# Altium PCB PCB_LICH_VAN_NIEN_VER2.PcbDoc
Units mm, origin at the board's own origin, x right, y up, seen from the top; angles counter-clockwise.
Board outline 98.8 x 97.6 mm, 2 copper layers (Top Layer, Bottom Layer); 31 components, 43 nets, 145 pads, 28 vias.
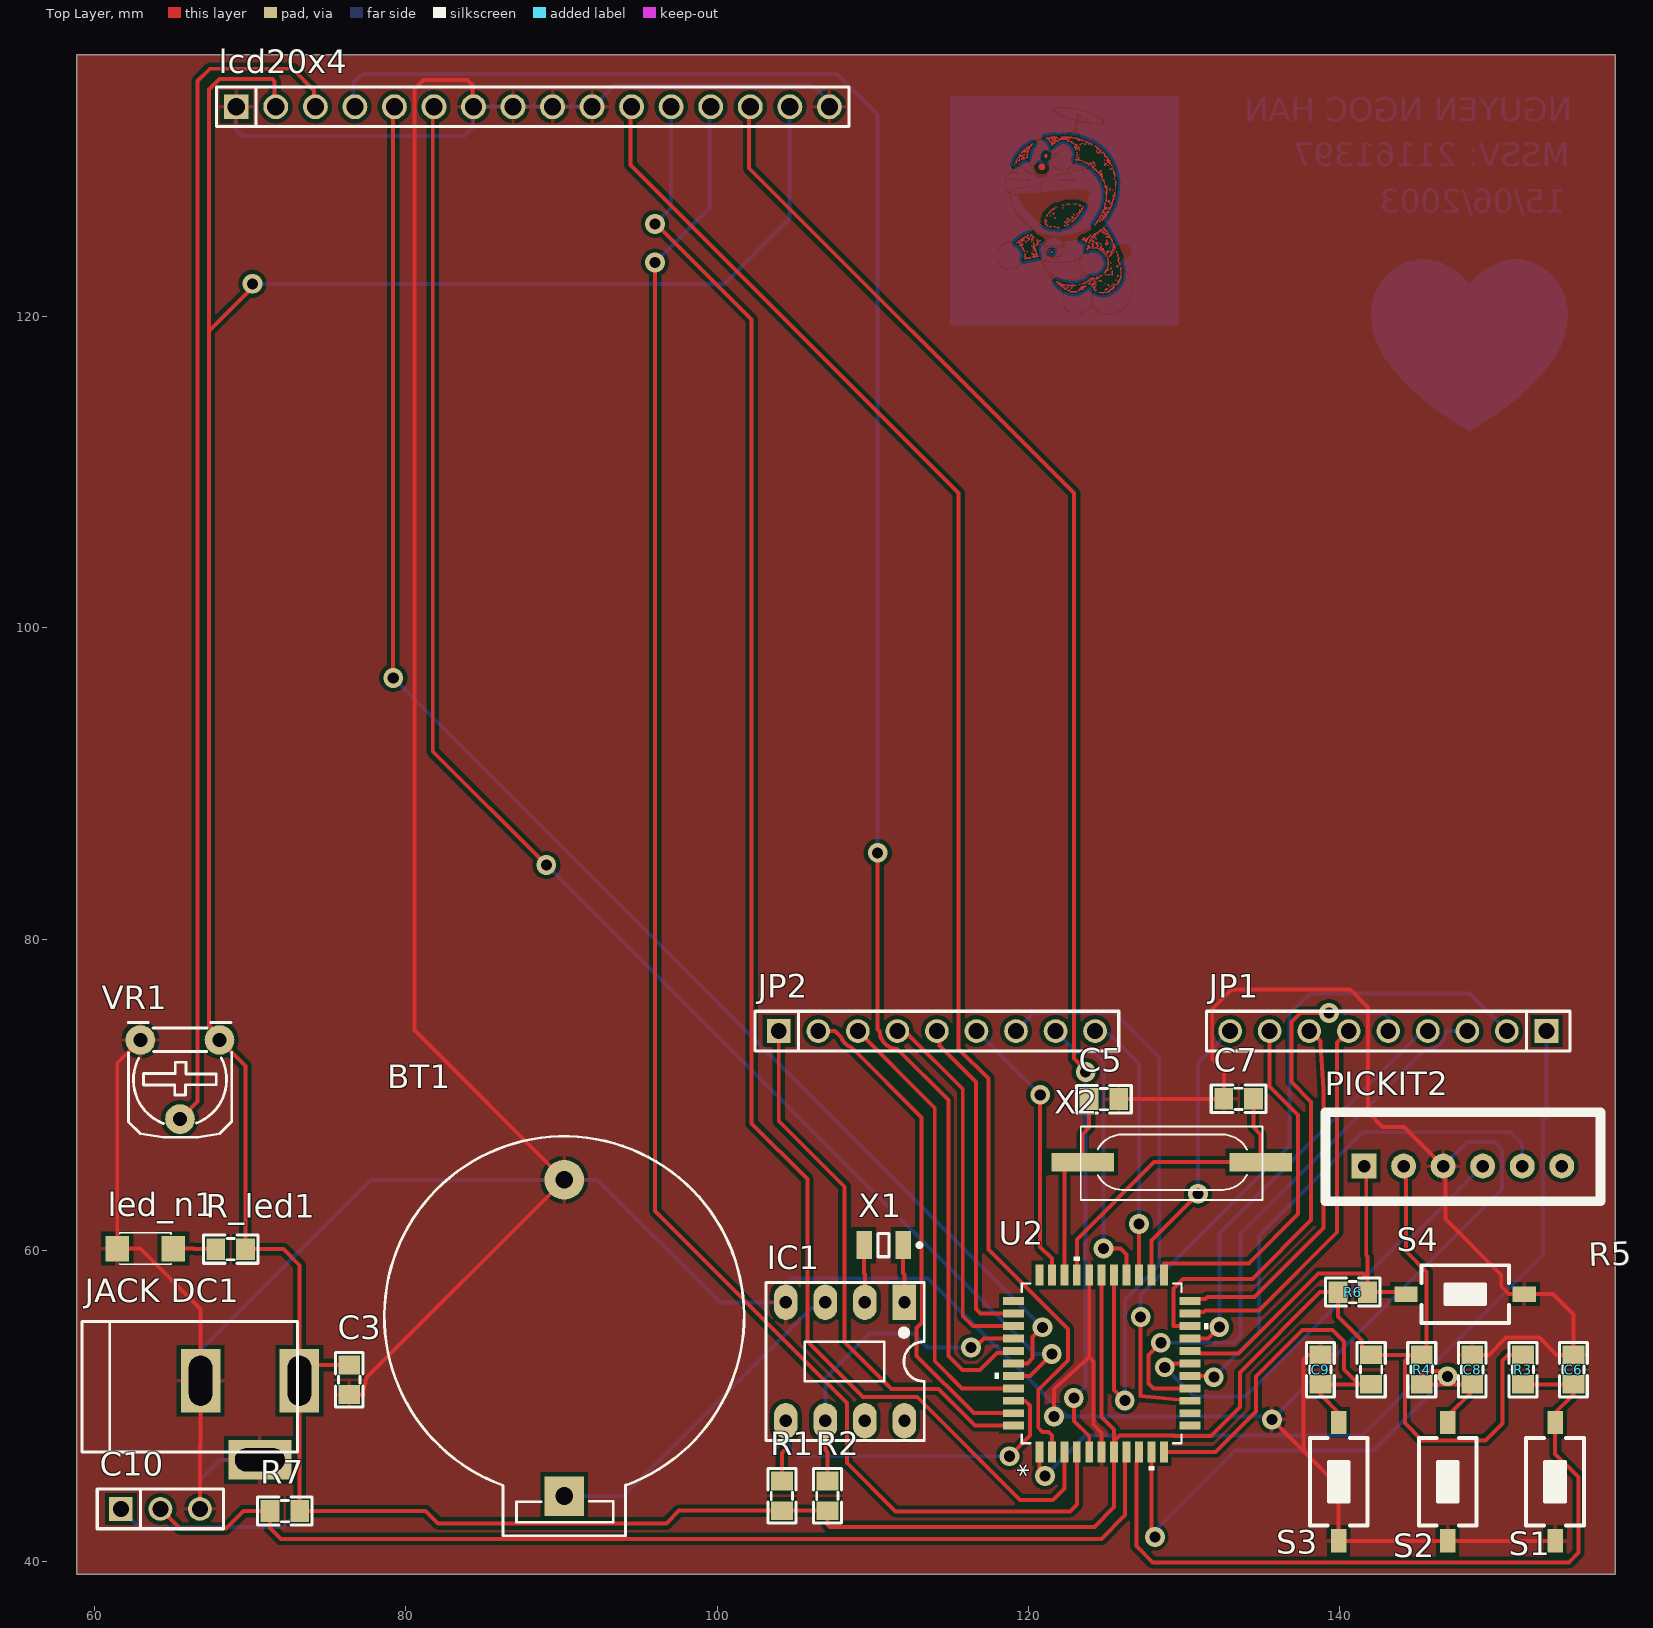
[diagram p0: Top Layer view]
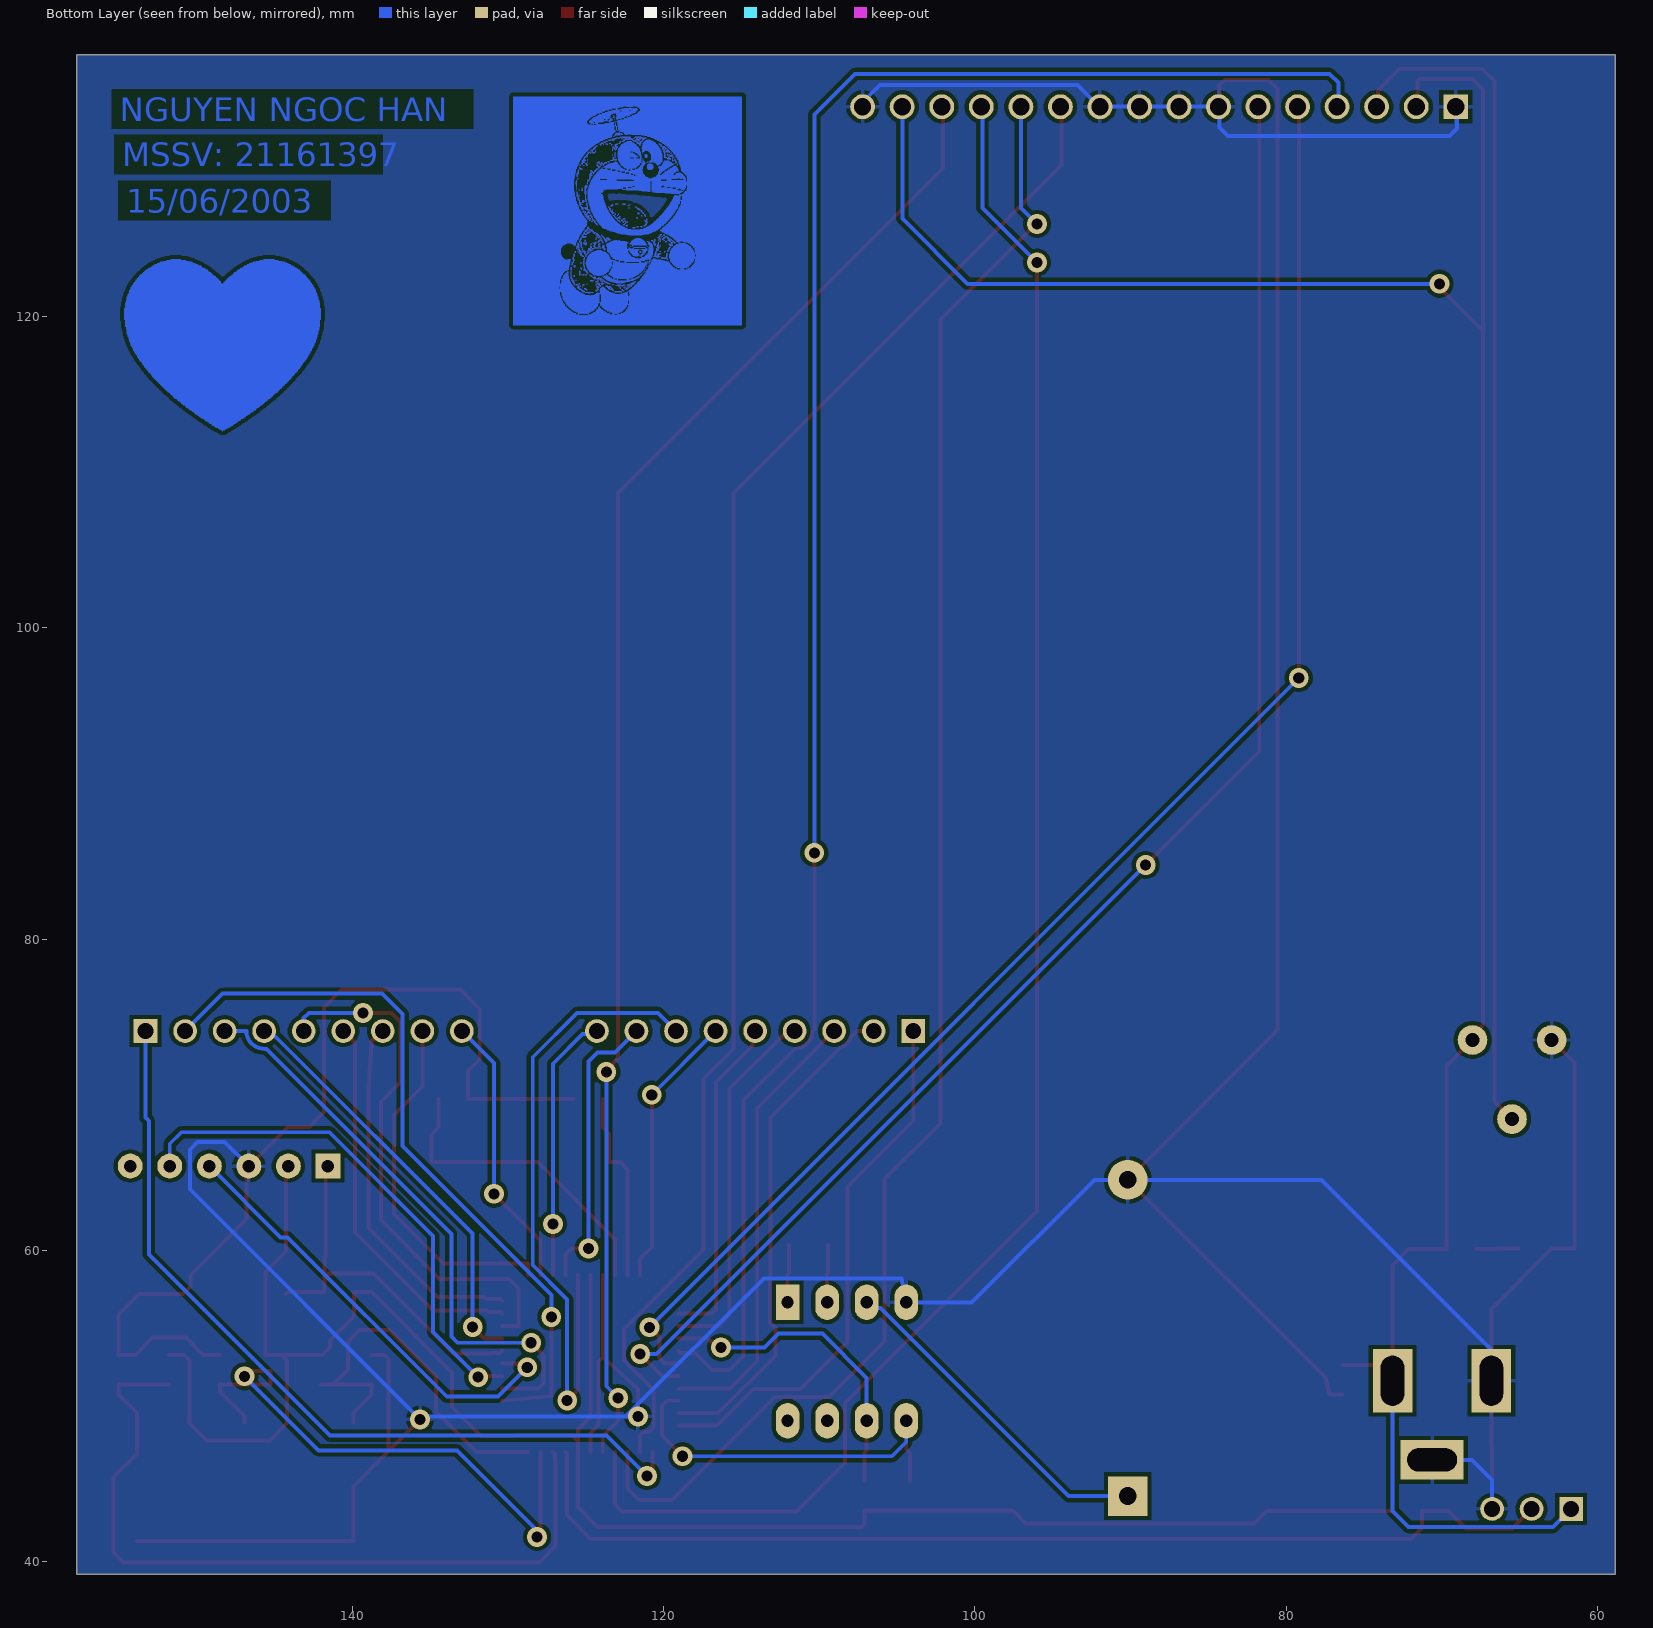
[diagram p1: Bottom Layer view, seen from below]
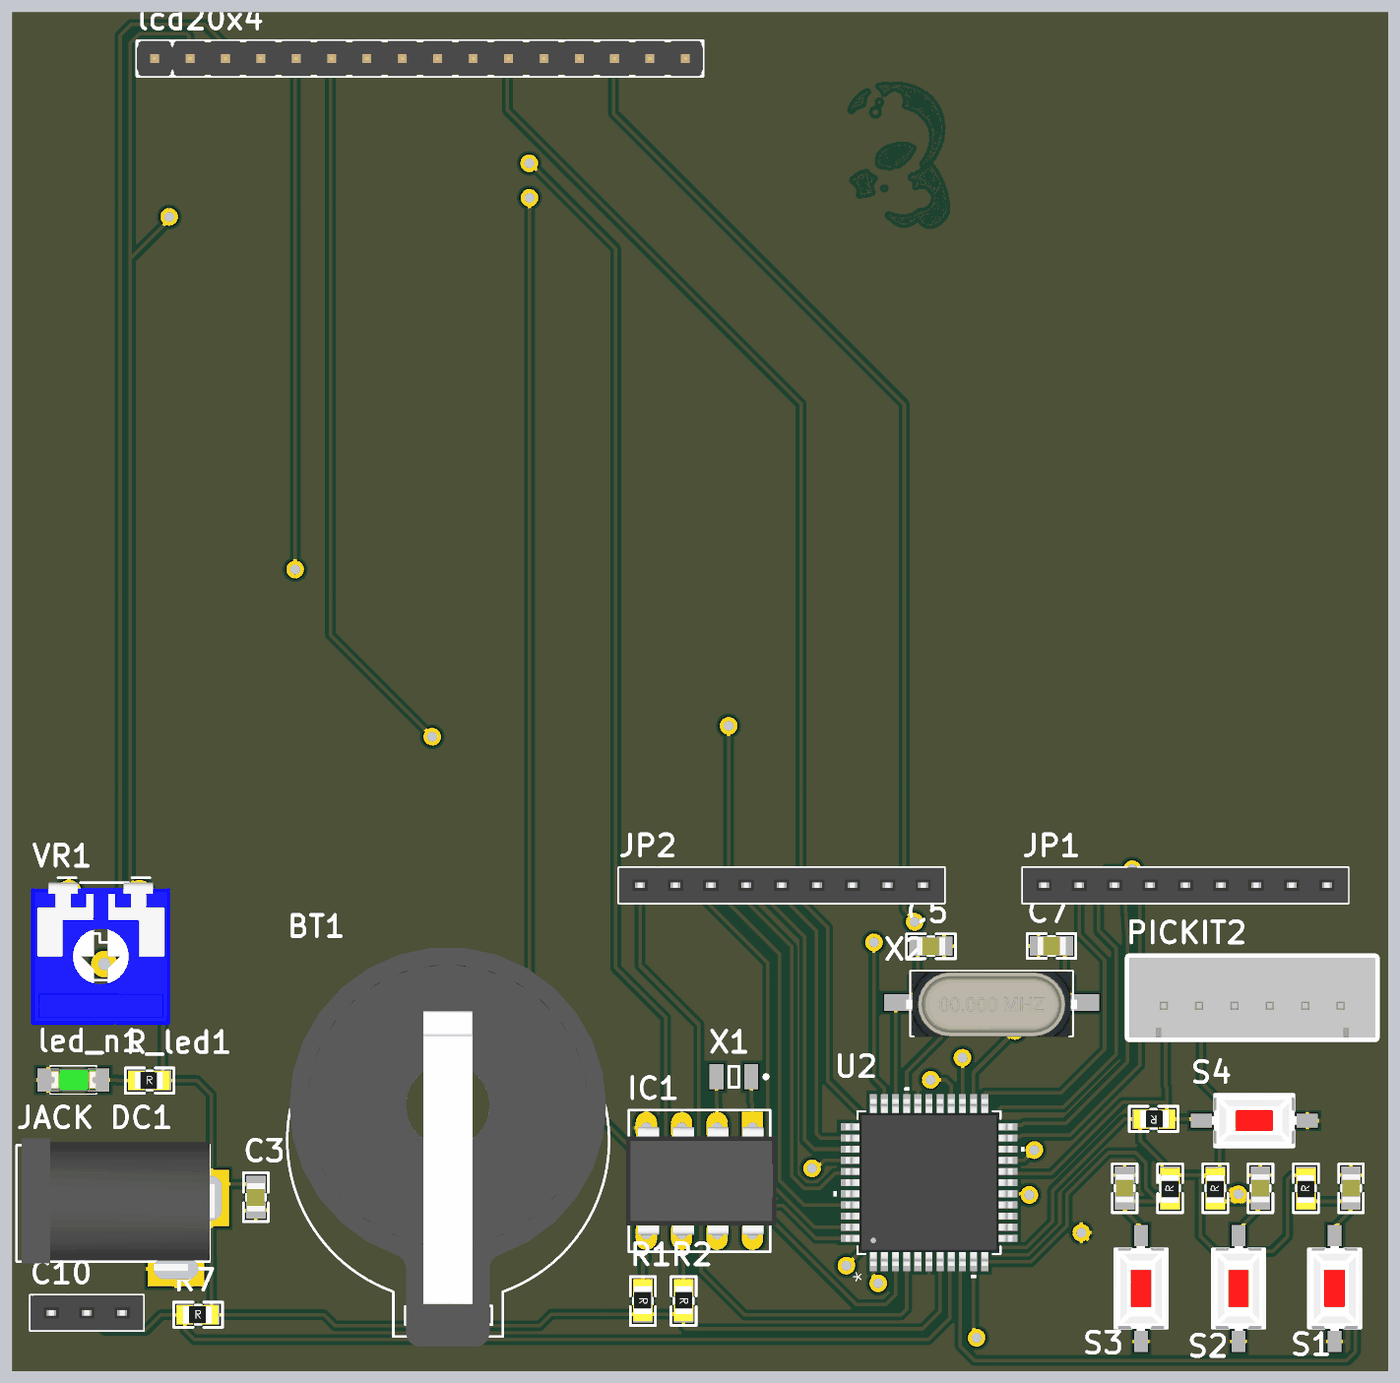
[diagram p2: 3D render of the assembled board from above, using the file's embedded part models]

## Layer stack, top to bottom
Top Solder: solder mask 0.0102, Solder Resist, Dk 3.5
Top Layer: signal copper 0.0356
Dielectric 1: dielectric 0.32, FR-4, Dk 4.8
Bottom Layer: signal copper 0.0356
Bottom Solder: solder mask 0.0102, Solder Resist, Dk 3.5

## Board outline
58.875,39.2 157.675,39.2 157.675,136.8 58.875,136.8

## Design rules (kind name [scope] priority, off if disabled: settings)
Clearance [All] p1: gap=0.254 ignorepadtopadclearanceinfootprint=FALSE except(0: Arc-Hole Track-Hole SMDPad-Hole THPad-Hole Via-Hole Fill-Hole Poly-Hole Region-Hole Text-Hole)
PolygonConnect [All] p1: connectstyle=Relief reliefconductorwidth=0.254 reliefentries=4 polygonreliefangle="90 Angle" airgapwidth=0.254
RoutingVias [All] p1: holewidth=0.711 width=1.27 viastyle="Through Hole" minholewidth=0.711 minwidth=1.27 maxholewidth=0.711 maxwidth=1.27
SolderMaskExpansion [All] p1: expansion=0.102 istentingtop=FALSE
Width [All] p1: maxlimit=0.254 minlimit=0.254 preferedwidth=0.254
30 further rules are at their usual default settings.

## Components (designator, comment, footprint, x,y, rotation, side; value= is the part's Value field where it differs from the comment)
BT1 "PIN 3V" PIN3V 90.175,44.225 r90 top
C3 "104" "tu 0805" 76.371,51.702 r270 top
C5 "104" "tu 0805" 124.843,69.723 r180 top
C6 "104" "tu 0805" 155,52.347 r90 top
C7 "104" "tu 0805" 133.493,69.748 r0 top
C8 "104" "tu 0805" 148.499,52.347 r90 top
C9 "104" "tu 0805" 138.747,52.347 r90 top
C10 "DHT11" JP3-C1T 61.695,43.4 r0 top
IC1 "DS1307" DIP8 108.343,52.873 r180 top
"JACK DC1" "JACK DC 5.5" "JACK DC 5.5" 69.993,49.098 r0 top value="Jac DC"
JP1 "JP 1x9 2.54" "JP 1x9 CT" 143.11,74.1 r180 top
JP2 "JP 1x9 2.54" "JP 1x9 CT" 114.115,74.1 r0 top
lcd20x4 "JP16" JP16-D1T 69.105,133.475 r0 top
led_n1 "LED 0805" LED-1206-Green 65.068,60.123 r180 top
PICKIT2 "Header 6P 2.54 Duc Thang" XH2.54M-6 141.555,65.425 r0 top
R1 "4.7k" "tro smd 0805" 104.218,44.248 r270 top
R2 "4.7k" "tro smd 0805" 107.143,44.248 r270 top
R3 "4.7k" "tro smd 0805" 151.699,52.35 r90 top
R4 "4.7k" "tro smd 0805" 145.197,52.35 r90 top
R5 "4.7k" "tro smd 0805" 141.946,52.35 r90 top
R6 "4.7k" "tro smd 0805" 140.829,57.264 r180 top
R7 "4.7k" "tro smd 0805" 72.225,43.325 r0 top
R_led1 "1k" "tro smd 0805" 68.743,60.148 r0 top
S1 "SW" "BUTTON-SMD 2PIN" 153.825,45.15 r90 top
S2 "SW" "BUTTON-SMD 2PIN" 146.925,45.15 r90 top
S3 "SW" "BUTTON-SMD 2PIN" 139.925,45.15 r90 top
S4 "SW" "BUTTON-SMD 2PIN" 148.05,57.2 r180 top
U2 "PIC16F887-IPTVAO" TQFP44_PT_MCH 124.7,52.75 r90 top
VR1 "10k" VR-S2 68.03,73.525 r180 top
X1 "32768hz" XT2-32.768KHz-2_V 110.693,60.348 r180 top value=4Mhz
X2 "20Mhz" XTAL-RU49/4 134.15,65.675 r180 top value=4Mhz

## Footprints (in the part's own frame and the unit in brackets; to place one, negate y for a bottom-side part, rotate by r counter-clockwise, add the part's x,y. Pads: shape width x height; smd on the part's side, far side on the other; paste and mask are expansions set on the pad)
"BUTTON-SMD 2PIN" [mm] "Switch SMD type"
  rect 1.5x1 smd: 1(-3.8,0) 2(3.8,0)
  silkscreen extent -2.82,-1.85 2.82,1.85, body extent -3.05,-1.85 3.05,1.85, height 2.5
DIP8 [mil] "DIP, 8-Leads, Row Spacing 7.62mm, Pitch 2.54mm, Body 9.91x6.73mm"
  rect 60x90 hole 31: 1(-145,-150)
  oval 60x90 hole 31: 2(-45,-150) 3(55,-150) 4(155,-150) 5(155,150) 6(55,150) 7(-45,150) 8(-145,150)
  silkscreen extent -195,-200 205,200, body extent -213,-153 213,153, height 177
"JACK DC 5.5" [mm] "Jac DC input"
  rect 2.54x4.064 hole 1.5 slot 3.2 at 90 deg: 1(3.175,2.54) 2(-3.175,2.54)
  rect 4.064x2.54 hole 1.5 slot 3.2 at 0 deg: 3(0.635,-2.54)
  silkscreen extent -10.8,-2.03 3.05,6.35, body extent -10.42,-2.67 3.4,6.84, height 11.02
JP3-C1T [mm] "3 row, straight, gold plating"
  rect 1.52x1.52 hole 1.02: 1(0,0)
  round 1.52 hole 1.02: 2(2.54,0) 3(5.08,0)
  silkscreen extent -1.52,-1.27 6.6,1.27, body extent -1.52,-1.25 6.6,1.25, height 8.51
JP16-D1T [mm] "16  pins, 1 row, straight, gold plating"
  rect 1.6x1.6 hole 1.1: 1(0,0)
  round 1.6 hole 1.1: 2(2.54,0) 3(5.08,0) 4(7.62,0) 5(10.16,0) 6(12.7,0) 7(15.24,0) 8(17.78,0) 9(20.32,0) 10(22.86,0) 11(25.4,0) 12(27.94,0) 13(30.48,0) 14(33.02,0) 15(35.56,0) 16(38.1,0)
  silkscreen extent -1.27,-1.27 39.37,1.27, body extent -1.27,-1.27 39.37,1.27, height 8.54
"JP 1x9 CT" [mm] "9 row, straight, gold plating"
  rect 1.52x1.52 hole 1.02: 1(-10.16,0)
  round 1.52 hole 1.02: 2(-7.62,0) 3(-5.08,0) 4(-2.54,0) 5(0,0) 6(2.54,0) 7(5.08,0) 8(7.62,0) 9(10.16,0)
  silkscreen extent -11.68,-1.27 11.68,1.27, body extent -11.68,-1.25 11.68,1.25, height 8.51
LED-1206-Green [mil]
  rect 60x65 smd: 1(0,0) 2(142,0)
  silkscreen extent 6,-40 136,40, body extent 7,-31 133,32, height 43
PIN3V [mil] "Socket PIN 3V"
  rect 100x100 hole 45: 1(0,0)
  round 100 hole 45: 2(800,0)
  silkscreen extent -100,-455 910,455, body extent -128,-447 1002,449, height 278
TQFP44_PT_MCH [mil]
  rect 53x20 smd paste+0 mask+0: 1(-223.5,157.48) 2(-223.5,125.98) 3(-223.5,94.49) 4(-223.5,62.99) 5(-223.5,31.5) 6(-223.5,0) 7(-223.5,-31.5) 8(-223.5,-62.99) 9(-223.5,-94.49) 10(-223.5,-125.99) 11(-223.5,-157.48) 23(223.5,-157.48) 24(223.5,-125.99) 25(223.5,-94.49) 26(223.5,-62.99) 27(223.5,-31.5) 28(223.5,0) 29(223.5,31.5) 30(223.5,62.99) 31(223.5,94.49) 32(223.5,125.98) 33(223.5,157.48)
  rect 20x53 smd paste+0 mask+0: 12(-157.48,-223.5) 13(-125.98,-223.5) 14(-94.49,-223.5) 15(-62.99,-223.5) 16(-31.5,-223.5) 17(0,-223.5) 18(31.5,-223.5) 19(62.99,-223.5) 20(94.49,-223.5) 21(125.98,-223.5) 22(157.48,-223.5) 34(157.48,223.5) 35(125.98,223.5) 36(94.49,223.5) 37(62.99,223.5) 38(31.5,223.5) 39(0,223.5) 40(-31.5,223.5) 41(-62.99,223.5) 42(-94.49,223.5) 43(-125.98,223.5) 44(-157.48,223.5)
  silkscreen extent -270,-270 270,270, body extent -236,-236 236,236, height 47
"tro smd 0805" [mm]
  rect 1.2x1.4 smd: 1(-0.946,-0.061) 2(0.954,-0.061)
  silkscreen extent -1.75,-0.97 1.75,0.84, body extent -1.56,-0.76 1.44,0.64, height 0.53
"tu 0805" [mm] "Compoment SMD 80x50mil"
  rect 1.2x1.4 smd: 1(-0.946,-0.003) 2(0.954,-0.003)
  silkscreen extent -1.75,-0.89 1.75,0.89, body extent -1.01,-0.64 1.01,0.63, height 0.61
VR-S2 [mil] "Resistor Variable"
  round 75 hole 35: 1(0,0) 2(100,200) 3(200,0)
  silkscreen extent -31,-44 231,246, body extent -87,-30 307,372, height 165
XH2.54M-6 [mm]
  rect 1.6x1.6 hole 0.8: 1(0,0)
  round 1.6 hole 0.8: 2(2.54,0) 3(5.08,0) 4(7.62,0) 5(10.16,0) 6(12.7,0)
  silkscreen extent -2.48,-2.26 15.18,3.46, body extent -2.48,-2.26 15.18,3.48, height 6.91
XT2-32.768KHz-2_V [mm] "Hand Drawn, 2-Leads, Body 3.2x1.5mm, Pitch 2.5mm"
  rect 1x1.8 smd: 1(-1.25,0) 2(1.25,0)
  silkscreen extent -2.43,-0.75 0.35,0.75, body extent -1.6,-0.75 1.6,0.75, height 0.9
XTAL-RU49/4 [mm]
  rect 4x1.2 smd: 1(-0.762,0) 2(10.668,0)
  silkscreen extent -0.89,-2.29 10.8,2.41, body extent -1.2,-2.22 11.1,2.48, height 4.3

## Part data
BT1: "Battery 3VDC"
C3 C5 C6 C7 C8 C9: library part "Tu 0805 104 50V 10%", "Dán", Chung_Loai=Dán, Don_Vi=Con, Ma_Hang=MH004551, So_Chan=2, Ten_Linh_Kien="Tụ 0805 104-100nF 10% 50V"
C10: library part JP3, "WR-PHD 2.54 mm Angled Socket Header", Manufacturer="W¨¹rth Elektronik eiSos GmbH", partNo=613003143121, ComponentLink1 Description=Manufacturer, ComponentLink1URL=http://www.we-online.com, ComponentLink2 Description=Datasheet, ComponentLink2URL=http://katalog.we-online.de/em/datasheet/6130xx143121.pdf, Created by="Karrer Zheng", Created Date="29 March 2013", NoPins=03
IC1: "Real Timer Serial"
JP1 JP2: library part "JP 1x9 2.54 Cai Thang", "Cắm", Chung_Loai=Cắm, Don_Vi=Con, Ma_Hang=MH004006, Ten_Linh_Kien="Jump Đơn Cái 2.54MM 1x20P Thẳng"
lcd20x4: "WR-PHD 2.54 mm Angled Socket Header", Manufacturer="W¨¹rth Elektronik eiSos GmbH", partNo=613016143121, ComponentLink1 Description=Manufacturer, ComponentLink1URL=http://www.we-online.com, ComponentLink2 Description=Datasheet, ComponentLink2URL=http://katalog.we-online.de/em/datasheet/6130xx143121.pdf, Created by="Karrer Zheng", Created Date="29 March 2013", NoPins=16
led_n1: library part "LED 1206 Xanh La", "Dán", Chung_Loai=Dán, Don_Vi=Con, Ma_Hang=MH002947, Ten_Linh_Kien="LED1206 Màu Xanh Lá (Green)"
PICKIT2: "Cắm", Chung_Loai=Cắm, Don_Vi=Con, Ma_Hang=MH001972, Ten_Linh_Kien="Header 6P XH2.54-6P Đực Thẳng"
R1 R2 R3 R4 R5 R6 R7 R_led1: library part "Tro 0805 5% 4.7k", "Dán", Chung_Loai=Dán, Don_Vi=Con, Ma_Hang=MH005307, So_Chan=2, Ten_Linh_Kien="Trở 0805 5% 4.7k"
S1 S2 S3 S4: library part SW-Button, "Switch-Button", LatestRevisionDate=17-Jul-2002, LatestRevisionNote="Re-released for DXP Platform.", PackageReference=SPST-2, Published=24-Mar-1999, Publisher="Altium Limited"
U2: "No Description Available", Mfr_Name=Microchip, RefDes=RefDes, Type=Type
VR1: library part "Resistor Var"
X1 X2: library part XT2, "Crystal, 32.768 KHz, -40 to 85 degC, 3.2 x 1.5 x 0.9 mm SMD"

## Via types
v1: diameter 1.27, hole 0.711, Top Layer to Bottom Layer, 28 vias

## Nets (pads, with @x,y where several pads share a name; then routed paths per layer and width w, separated by ;. In a path a pad name is that pad's centre, name@x,y a point inside that pad or via, vN(x,y) a via of type N, cw(c..) or ccw(c..) an arc to the next point about the centre after c; other vN are vias at no path point)
5V: "JACK DC1.1" C3.1 C10.1 lcd20x4.2 lcd20x4.15 PICKIT2.2 R1.2 R2.2 R3.2 R4.2 R5.2 R6.2 R7.2 R_led1.2 U2.7 U2.28 VR1.1 | length 301.2
  Top Layer w0.254: v1(70.149,122.101) 70.149,121.874 67.35,119.075 ; lcd20x4.2@71.57,133.5 71.57,135.101 71.421,135.25 68.025,135.25 67.35,134.575 67.35,119.075 ; C3.1 74.178,52.648 73.168,51.638 ; U2.28 124.7,49.306 125.5,48.506 125.5,47.752 ; PICKIT2.2 144.235,65.285 144.235,59.956 145.567,58.623 145.567,53.304 R4.2 144.526,53.304 ; R3.2 150.8,53.304 150.444,52.949 150.444,48.895 149.352,47.803 145.288,47.803 144.17,48.92 144.17,52.949 144.526,53.304 ; 67.35,119.075 67.35,74.499 68.03,73.819 VR1.1 69.697,71.858 R_led1.2 72.136,60.087 73.168,59.055 73.168,51.638 ; 73.168,51.638 73.168,47.433 73.179,47.422 R7.2 81.272,43.264 82.067,42.469 96.737,42.469 97.561,43.293 R1.2 R2.2 107.082,42.399 107.231,42.25 124.225,42.25 125.5,43.525 U2.7 125.5,47.752 ; 125.5,47.752 125.881,48.133 129.337,48.133 129.385,48.085 131.71,48.085 133.575,49.95 133.575,52.175 138.725,57.325 R6.2 139.875,55.775 141.434,54.216 141.434,53.777 141.907,53.304 R5.2 144.526,53.304
  Bottom Layer w0.254: C10.1 62.855,42.24 72.136,42.24 73.168,43.272 73.168,51.638 ; v1(70.149,122.101) 100.459,122.101 104.65,126.292 104.65,133.44 lcd20x4.15@104.59,133.5
CLK: PICKIT2.5 U2.16 | length 33.3
  Top Layer w0.254: U2.16 131.819,51.95 v1(131.902,51.867)
  Bottom Layer w0.254: v1(131.902,51.867) 134.798,54.762 134.798,60.948 141.45,67.6 150.975,67.6 151.715,66.86 PICKIT2.5
DAT: PICKIT2.4 U2.17 | length 29.1
  Top Layer w0.254: v1(128.753,52.496) 129.007,52.75 U2.17
  Bottom Layer w0.254: v1(128.753,52.496) 130.626,50.622 133.922,50.622 144.144,60.844 144.594,60.844 PICKIT2.4
DATA: C10.2 R7.1 U2.8 | length 69.1
  Top Layer w0.254: C10.2 65.496,42.139 68.453,42.139 69.579,43.264 R7.1 71.279,42.164 71.968,41.475 124.675,41.475 126.2,43 126.2,46.973 U2.8
EN: lcd20x4.6 U2.40 | length 100.3
  Top Layer w0.254: lcd20x4.6@81.73,133.5 81.73,92.066 v1(89.027,84.769) ; U2.40 120.091,51.95 v1(121.497,53.356)
  Bottom Layer w0.254: v1(89.027,84.769) 120.44,53.356 v1(121.497,53.356)
GND: "JACK DC1.2" "JACK DC1.3" BT1.2 C3.2 C5.1 C6.2 C7.1 C8.2 C9.2 C10.3 IC1.4 lcd20x4.1 lcd20x4.7 lcd20x4.8 lcd20x4.9 lcd20x4.10 lcd20x4.16 led_n1.2 PICKIT2.3 S1.1 S2.1 S3.1 S4.1 U2.6 U2.29 VR1.3 | length 403.3
  Top Layer w0.254: VR1.3 61.461,72.036 led_n1.2 62.94,60.123 66.818,56.245 66.818,51.638 66.818,47.515 66.775,47.473 C10.3 ; C3.2 77.216,50.748 77.47,51.84 BT1.2 80.543,74.177 80.543,134.62 81.128,135.204 83.94,135.204 84.27,134.874 lcd20x4.7@84.27,133.5 ; v1(121.641,49.342) 121.641,51.098 123.9,53.149 ; U2.29 123.9,53.149 ; U2.6 124.7,48.29 124.181,48.809 124.181,52.869 123.9,53.149 ; C5.1 129.134,69.726 129.152,69.744 C7.1 132.547,71.542 131.801,72.288 131.801,75.526 133.034,76.759 140.666,76.759 141.8,75.625 141.8,68.9 142.75,67.95 144.11,67.95 PICKIT2.3 146.775,65.285 146.775,62.025 150.368,58.432 150.368,57.708 150.876,57.2 S4.1 153.683,57.2 155.003,55.88 C6.2 153.924,53.302 152.819,54.407 150.673,54.407 149.568,53.302 C8.2 ; v1(135.636,49.149) 137.668,47.117 ; C9.2 137.922,53.302 137.668,53.048 137.668,47.117 ; S1.1 S2.1 S3.1 139.925,44.86 137.668,47.117
  Bottom Layer w0.254: C10.3 66.775,45.261 68.072,46.558 70.628,46.558 ; 66.818,51.638 66.818,53.619 77.743,64.545 BT1.2 92.325,64.545 100.203,56.667 104.406,56.667 IC1.4 104.71,58.217 113.553,58.217 122.428,49.342 ; lcd20x4.1@69.03,133.5 69.03,132.08 69.51,131.6 83.725,131.6 84.27,132.145 84.27,133.5 86.81,133.5 89.35,133.5 92.025,133.5 93.4,134.875 106.1,134.875 106.75,134.225 106.75,134.223 107.13,133.843 lcd20x4.16@107.13,133.5 ; v1(121.641,49.342) 122.428,49.342 ; PICKIT2.3 148.185,66.975 149.925,66.975 150.425,66.475 150.425,63.938 v1(135.636,49.149) 135.443,49.342 122.428,49.342
MCLR: PICKIT2.1 R6.1 S4.2 U2.18 | length 24.4
  Top Layer w0.254: U2.18 130.504,53.423 131.034,53.423 131.072,53.385 133.485,53.385 138.622,58.522 141.478,58.522 141.775,58.225 ; PICKIT2.1 141.695,65.285 141.695,59.694 141.775,59.614 141.775,58.225 ; S4.2 144.125,57.325 142.926,57.325 R6.1 141.775,58.225
NetBT1_1: BT1.1 IC1.3 | length 22.1
  Bottom Layer w0.254: BT1.1 93.984,44.225 106.07,56.312 106.946,56.312 IC1.3
NetC5_2: C5.2 U2.31 X2.2 | length 12.4
  Top Layer w0.254: U2.31 122.3,65.202 122.773,65.675 X2.2 123.482,67.488 123.888,67.894 C5.2
NetC6_1: C6.1 R3.1 S1.2 U2.9 | length 50.4
  Top Layer w0.254: U2.9 126.973,46.946 126.973,46.416 126.935,46.378 126.935,41.015 127.975,39.975 154.707,39.975 155.321,40.589 155.321,45.441 153.825,46.937 S1.2 153.825,49.581 155.003,50.759 C6.1 153.368,51.402 153.365,51.404 R3.1
NetC7_2: C7.2 U2.30 X2.1 | length 20.4
  Top Layer w0.254: U2.30 123.1,60.713 128.062,65.675 X2.1 134.912,67.462 134.447,67.927 C7.2
NetC8_1: C8.1 R4.1 S2.2 U2.10 | length 37.8
  Top Layer w0.254: U2.10 127.9,41.823 v1(128.118,41.605) ; v1(146.914,51.918) 146.583,52.248 145.258,52.248 R4.1 146.863,51.404 146.865,51.402 C8.1 148.502,50.955 146.925,49.378 S2.2
  Bottom Layer w0.254: v1(128.118,41.605) 128.118,42.012 133.274,47.168 142.164,47.168 v1(146.914,51.918)
NetC9_1: C9.1 R5.1 S3.2 U2.11 | length 25.8
  Top Layer w0.254: U2.11 128.7,47.066 132.016,47.066 134.62,49.67 134.62,51.92 137.6,54.9 139.525,54.9 140.275,54.15 140.275,52.353 141.224,51.404 ; S3.2 139.925,49.581 138.75,50.756 C9.1 140.363,51.404 141.224,51.404 ; R5.1 141.224,51.404
NetIC1_1: IC1.1 X1.1 | length 3.7
  Top Layer w0.254: X1.1 111.943,58.554 112.026,58.471 IC1.1
NetIC1_2: IC1.2 X1.2 | length 3.7
  Top Layer w0.254: X1.2 109.443,58.514 109.486,58.471 IC1.2
Netlcd20x4_3: lcd20x4.3 VR1.2 | length 76.6
  Top Layer w0.254: VR1.2 66.624,69.579 66.624,135.128 67.412,135.915 72.713,135.915 74.11,134.518 lcd20x4.3@74.11,133.5
Netlcd20x4_11: lcd20x4.11 U2.2 | length 99.4
  Top Layer w0.254: lcd20x4.11@94.43,133.5 94.43,129.745 115.514,108.661 115.514,72.954 117.425,71.043 117.425,60.07 122.53,54.966 122.53,52.95 120.625,51.045 120.625,48.616 120.904,48.336 121.297,48.336 121.5,48.133 U2.2
Netlcd20x4_12: lcd20x4.12 U2.3 | length 107.2
  Top Layer w0.254: v1(96,125.95) 96.075,125.95 102.21,119.815 102.21,68.174 105.791,64.592 105.791,54.159 109.353,50.597 112.853,50.597 119.463,43.987 121.583,43.987 122.3,44.704 U2.3
  Bottom Layer w0.254: v1(96,125.95) 96.012,125.95 97.045,126.983 lcd20x4.12@97.045,133.425
Netlcd20x4_13: lcd20x4.13 U2.4 | length 113.3
  Top Layer w0.254: v1(96.012,123.469) 96.012,62.535 108.331,50.216 108.331,46.367 111.448,43.25 122.675,43.25 123.1,43.675 U2.4
  Bottom Layer w0.254: v1(96.012,123.469) 99.51,126.967 lcd20x4.13@99.51,133.5
Netlcd20x4_14: lcd20x4.14 U2.5 | length 96.1
  Top Layer w0.254: lcd20x4.14@102.05,133.5 102.05,129.525 122.925,108.65 122.925,72.332 123.673,71.585 v1(123.673,71.476) ; v1(122.911,50.521) 122.911,49.063 123.9,48.074 U2.5
  Bottom Layer w0.254: v1(122.911,50.521) 123.673,51.283 v1(123.673,71.476)
Netled_n1_1: led_n1.1 R_led1.1 | length 2.7
  Top Layer w0.254: led_n1.1 66.396,60.123 66.431,60.087 R_led1.1
RA0: JP1.4 U2.19 | length 27
  Top Layer w0.254: U2.19 131.515,54.35 v1(132.258,55.093)
  Bottom Layer w0.254: v1(132.258,55.093) 132.258,61.083 144.91,73.735 144.942,73.735 145.307,74.1 JP1.4
RA1: JP1.5 U2.20 | length 34.8
  Top Layer w0.254: U2.20 129.311,55.15 129.311,57.572 129.914,58.175 134.375,58.175 138.15,61.95 138.15,69.55 136.881,70.819 136.881,74.676 137.465,75.26 v1(139.294,75.26)
  Bottom Layer w0.254: v1(139.294,75.26) 142.78,75.26 143.11,74.93 JP1.5
RA2: JP1.6 U2.21 | length 24.8
  Top Layer w0.254: U2.21 130.465,56.038 131.247,56.038 131.359,56.15 134.8,56.15 139.825,61.175 139.825,73.355 JP1.6
RA3: JP1.7 U2.22 | length 23.5
  Top Layer w0.254: U2.22 130.504,56.877 131.368,56.877 131.499,57.008 134.508,57.008 138.95,61.45 138.95,70.275 138.943,70.379 138.756,73.257 138.742,73.475 138.663,73.544 JP1.7
RA4: JP1.8 U2.23 | length 23.2
  Top Layer w0.254: U2.23 128.7,59.182 134.157,59.182 137.312,62.337 137.312,68.713 135.49,70.535 JP1.8
RA5: JP1.9 U2.24 | length 17.8
  Top Layer w0.254: U2.24 127.9,60.655 v1(130.886,63.641)
  Bottom Layer w0.254: v1(130.886,63.641) 130.886,72.036 JP1.9
RB4: JP1.2 U2.14 | length 47.2
  Top Layer w0.254: v1(127.203,55.728) 127.203,50.655 U2.14
  Bottom Layer w0.254: v1(127.203,55.728) 127.203,57.153 136.754,66.704 136.754,75.184 138.074,76.505 148.325,76.505 JP1.2
RB5: JP1.3 U2.15 | length 37.8
  Top Layer w0.254: v1(128.499,54.077) 127.711,53.289 127.711,51.455 128.016,51.15 U2.15
  Bottom Layer w0.254: v1(128.499,54.077) 133.223,54.077 133.625,54.479 133.625,61.075 145.509,72.959 145.615,72.959 145.618,72.959 ccw(c145.65,74.1) 146.458,73.294 ccw(c145.65,74.1) 146.791,74.1 JP1.3
RC0: JP2.6 U2.32 | length 17.7
  Top Layer w0.254: v1(120.752,70.003) 120.75,70.002 120.75,60.237 121.5,59.487 U2.32
  Bottom Layer w0.254: JP2.6 v1(120.752,70.003)
RC1: JP2.5 U2.35 | length 21.4
  Top Layer w0.254: JP2.5 114.289,73.926 114.289,73.168 116.625,70.832 116.625,56.247 116.922,55.95 U2.35
RC2: JP2.4 U2.36 | length 23.8
  Top Layer w0.254: JP2.4 111.817,73.858 112.292,73.858 115.775,70.375 115.775,55.8 116.425,55.15 U2.36
RC5: JP2.2 U2.43 | length 32.2
  Top Layer w0.254: JP2.2 107.575,74.1 107.961,73.714 ccw(c109.035,74.1) 108.649,73.026 113.125,68.55 113.125,58.027 113.169,57.984 113.169,55.382 112.8,55.013 112.8,53.24 116.49,49.55 U2.43
RC6: JP2.1 U2.44 | length 34.8
  Top Layer w0.254: JP2.1 103.955,68.32 108.179,64.096 108.179,54.127 111.201,51.105 114.217,51.105 116.571,48.75 U2.44
RC7: JP1.1 U2.1 | length 54
  Top Layer w0.254: U2.1 120.7,45.873 v1(121.056,45.517)
  Bottom Layer w0.254: v1(121.056,45.517) 123.647,48.108 141.427,48.108 153.06,59.741 153.06,68.326 153.27,68.536 JP1.1
RD3: JP2.3 U2.41 | length 29
  Top Layer w0.254: JP2.3 113.975,69.16 113.975,52.894 115.718,51.15 U2.41
RE0: JP2.9 U2.25 | length 17.3
  Top Layer w0.254: U2.25 v1(127.1,61.71)
  Bottom Layer w0.254: JP2.9 124.465,73.91 125.19,73.91 127.1,72 v1(127.1,61.71)
RE1: JP2.8 U2.26 | length 18.9
  Top Layer w0.254: v1(124.816,60.133) 125.908,60.133 126.3,59.741 U2.26
  Bottom Layer w0.254: JP2.8 123.115,72.72 124.231,72.72 124.816,72.136 v1(124.816,60.133)
RE2: JP2.7 U2.27 | length 42.2
  Top Layer w0.254: U2.27 125.5,51.055 v1(126.187,50.368)
  Bottom Layer w0.254: JP2.7 120.355,75.26 125.552,75.26 128.397,72.415 128.397,59.065 126.187,56.856 v1(126.187,50.368)
RS: lcd20x4.4 U2.38 | length 123.4
  Top Layer w0.254: v1(110.312,85.547) 110.312,74.213 110.339,74.186 110.364,74.161 110.366,74.159 110.387,74.138 110.434,74.089 ccw(c111.575,74.1) 111.566,72.959 114.85,69.675 114.85,53.225 115.75,52.325 116.875,52.325 117.973,53.423 118.896,53.423 U2.38
  Bottom Layer w0.254: lcd20x4.4@76.65,133.5 76.65,135.026 77.209,135.585 107.696,135.585 110.312,132.969 v1(110.312,85.547)
RW: lcd20x4.5 U2.39 | length 99.3
  Top Layer w0.254: v1(79.19,96.781) lcd20x4.5@79.19,133.5 ; U2.39 119.933,52.75 120.269,53.086 120.269,54.432 v1(120.904,55.067)
  Bottom Layer w0.254: v1(79.19,96.781) v1(120.904,55.067)
SCL: IC1.6 R2.1 U2.37 | length 20.5
  Top Layer w0.254: IC1.6 106.946,47.177 107.082,47.041 R2.1 ; v1(116.3,53.775) 116.575,53.775 117.15,54.35 U2.37
  Bottom Layer w0.254: IC1.6 106.946,51.816 109.79,54.661 112.618,54.661 113.504,53.775 v1(116.3,53.775)
SDA: IC1.5 R1.1 U2.42 | length 25.1
  Top Layer w0.254: R1.1 104.157,46.99 104.406,47.239 IC1.5 ; v1(118.77,46.787) 120.091,48.108 120.091,50.038 119.779,50.35 U2.42
  Bottom Layer w0.254: IC1.5 104.406,47.69 105.308,46.787 v1(118.77,46.787)
pads on no net: IC1.7 IC1.8 PICKIT2.6 U2.12 U2.13 U2.33 U2.34

## Polygon pours and split planes (outlines as drawn)
GND on Bottom Layer "GND_L02_P008" (solid, pour order 8): 58.875,136.8 157.675,136.8 157.675,39.2 58.875,39.2
GND on Top Layer "GND_L01_P007" (solid, pour order 7): 58.875,136.8 157.675,136.8 157.675,39.2 58.875,39.2

## Other copper
Bottom Layer:
  region: 1083 vertices and 152 holes, not listed, extent 114.962,119.451 129.637,134.126
  region: 820 vertices and 0 holes, not listed, extent 142.018,112.632 154.625,123.669
  region: 125.316,124.778 125.316,124.751 125.344,124.751 125.344,124.723 125.344,124.696 125.316,124.696 125.316,124.669 125.316,124.642 125.316,124.615 125.316,124.588 125.316,124.56 125.316,124.533 125.316,124.506 125.316,124.479 125.289,124.479 125.289,124.452 125.289,124.425 125.235,124.425 125.235,124.397 125.235,124.37 125.208,124.37 125.208,124.343 125.208,124.316 125.208,124.289 125.235,124.289 125.235,124.261 125.18,124.261 125.18,124.289 125.18,124.316 125.18,124.343 125.18,124.37 125.18,124.397 125.18,124.425 125.208,124.425 125.208,124.452 125.235,124.452 125.235,124.479 125.235,124.506 125.235,124.533 125.262,124.533 125.262,124.56 125.262,124.588 125.262,124.615 125.262,124.642 125.262,124.669 125.262,124.696 125.262,124.723 125.235,124.723 125.235,124.751 125.235,124.778 125.235,124.805 125.316,124.805
  text "NGUYEN NGOC HAN" at 154.921,132.554 h1.52
  text "MSSV: 21161397" at 154.771,129.654 h1.52
  text "15/06/2003" at 154.521,126.679 h1.52
Multi-Layer:
  drawing of 287 lines, arcs and shapes, not listed

## Silkscreen, mask and mechanical layers (free items; w line width, h text height)
Mechanical 1:
  the board outline again, w1

## Text inside footprints (layer, text, board x,y; h text height)
U2: Top Overlay "*" at 120.554,45.448 h1.27 r90; Mechanical 13 "*" at 120.935,47.81 h1.27 r90